# Altium PCB PCB1.PcbDoc
Units mm, origin at the board's own origin, x right, y up, seen from the top; angles counter-clockwise.
Board outline 38 x 37.5 mm, 2 copper layers (Top Layer, Bottom Layer); 4 components, 9 nets, 28 pads, 3 vias.
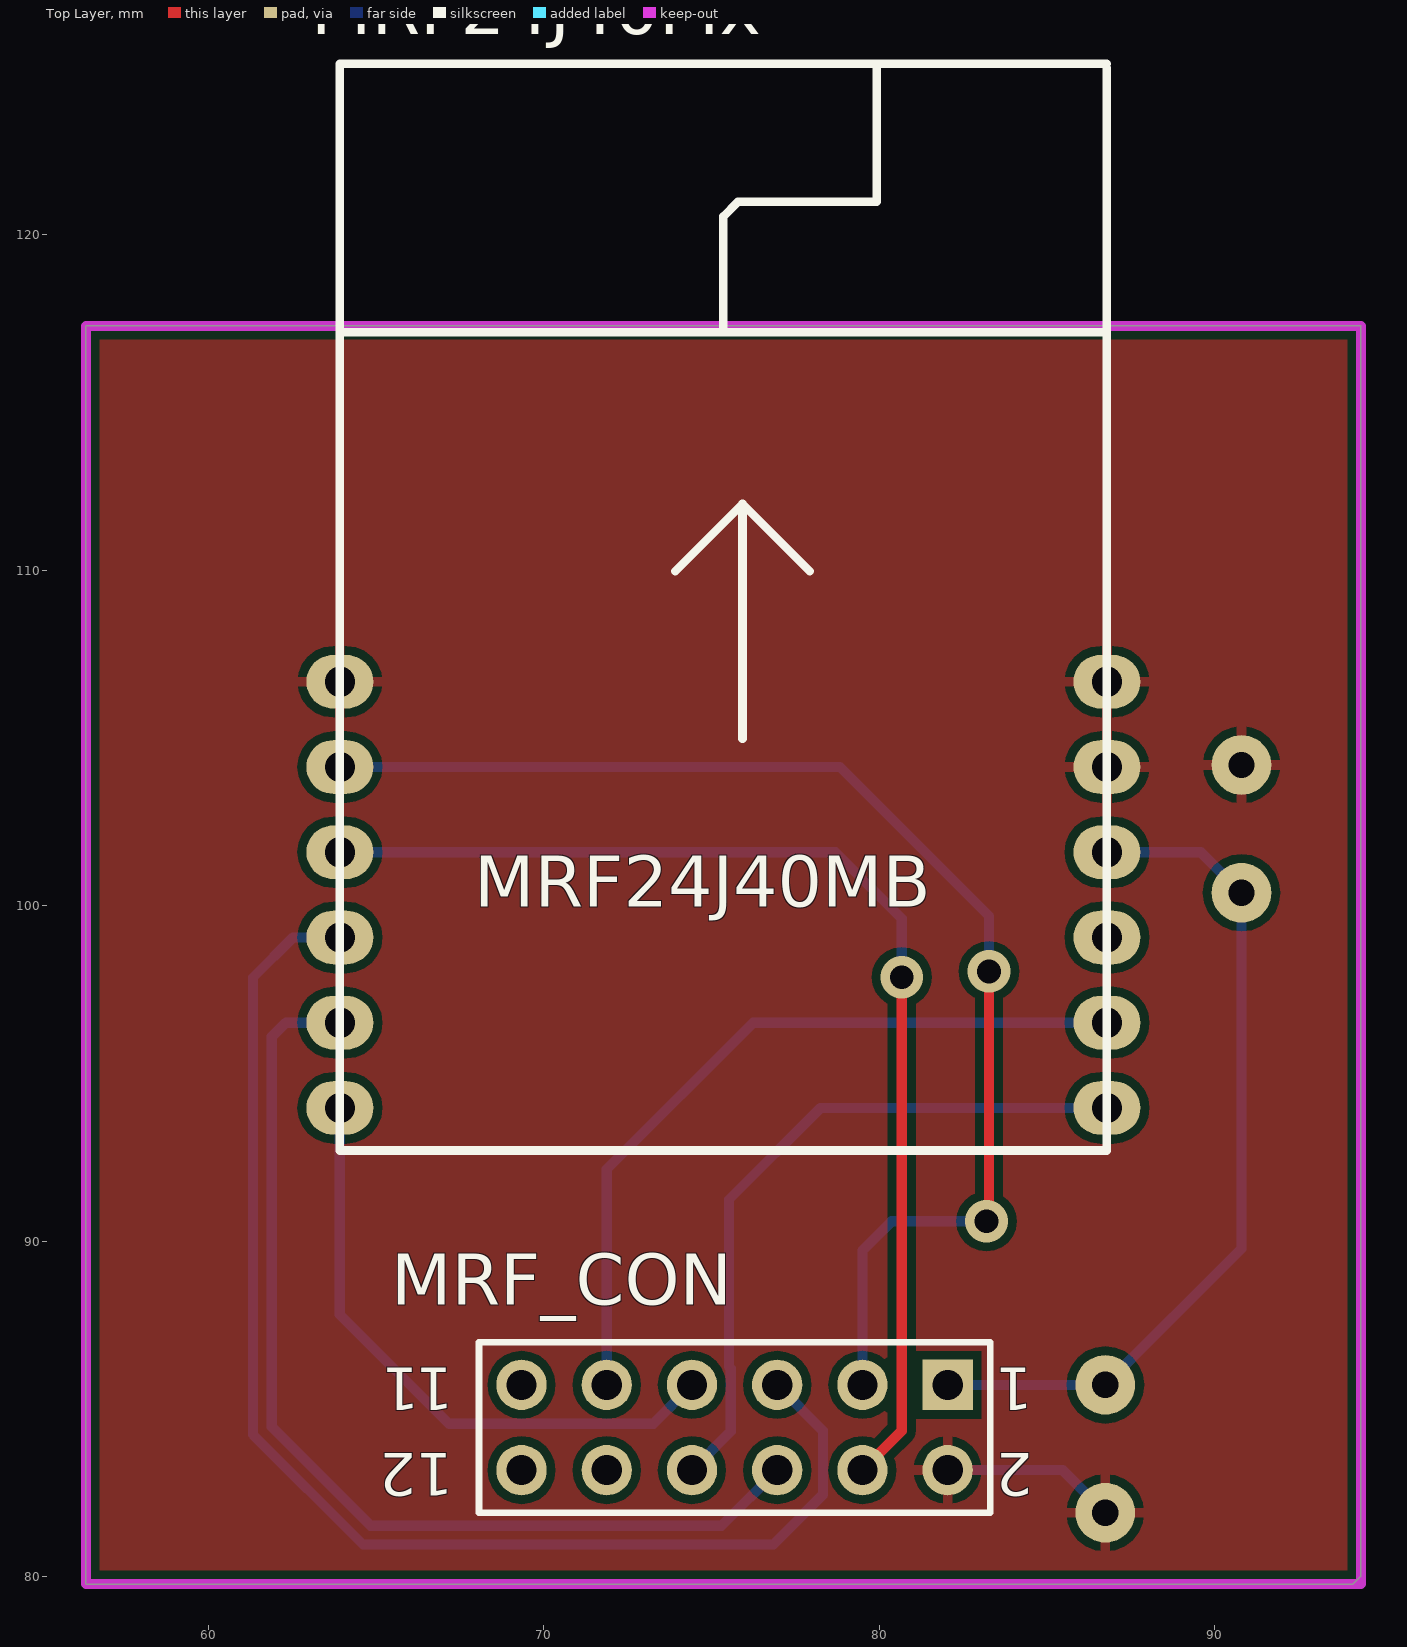
[diagram p0: Top Layer view]
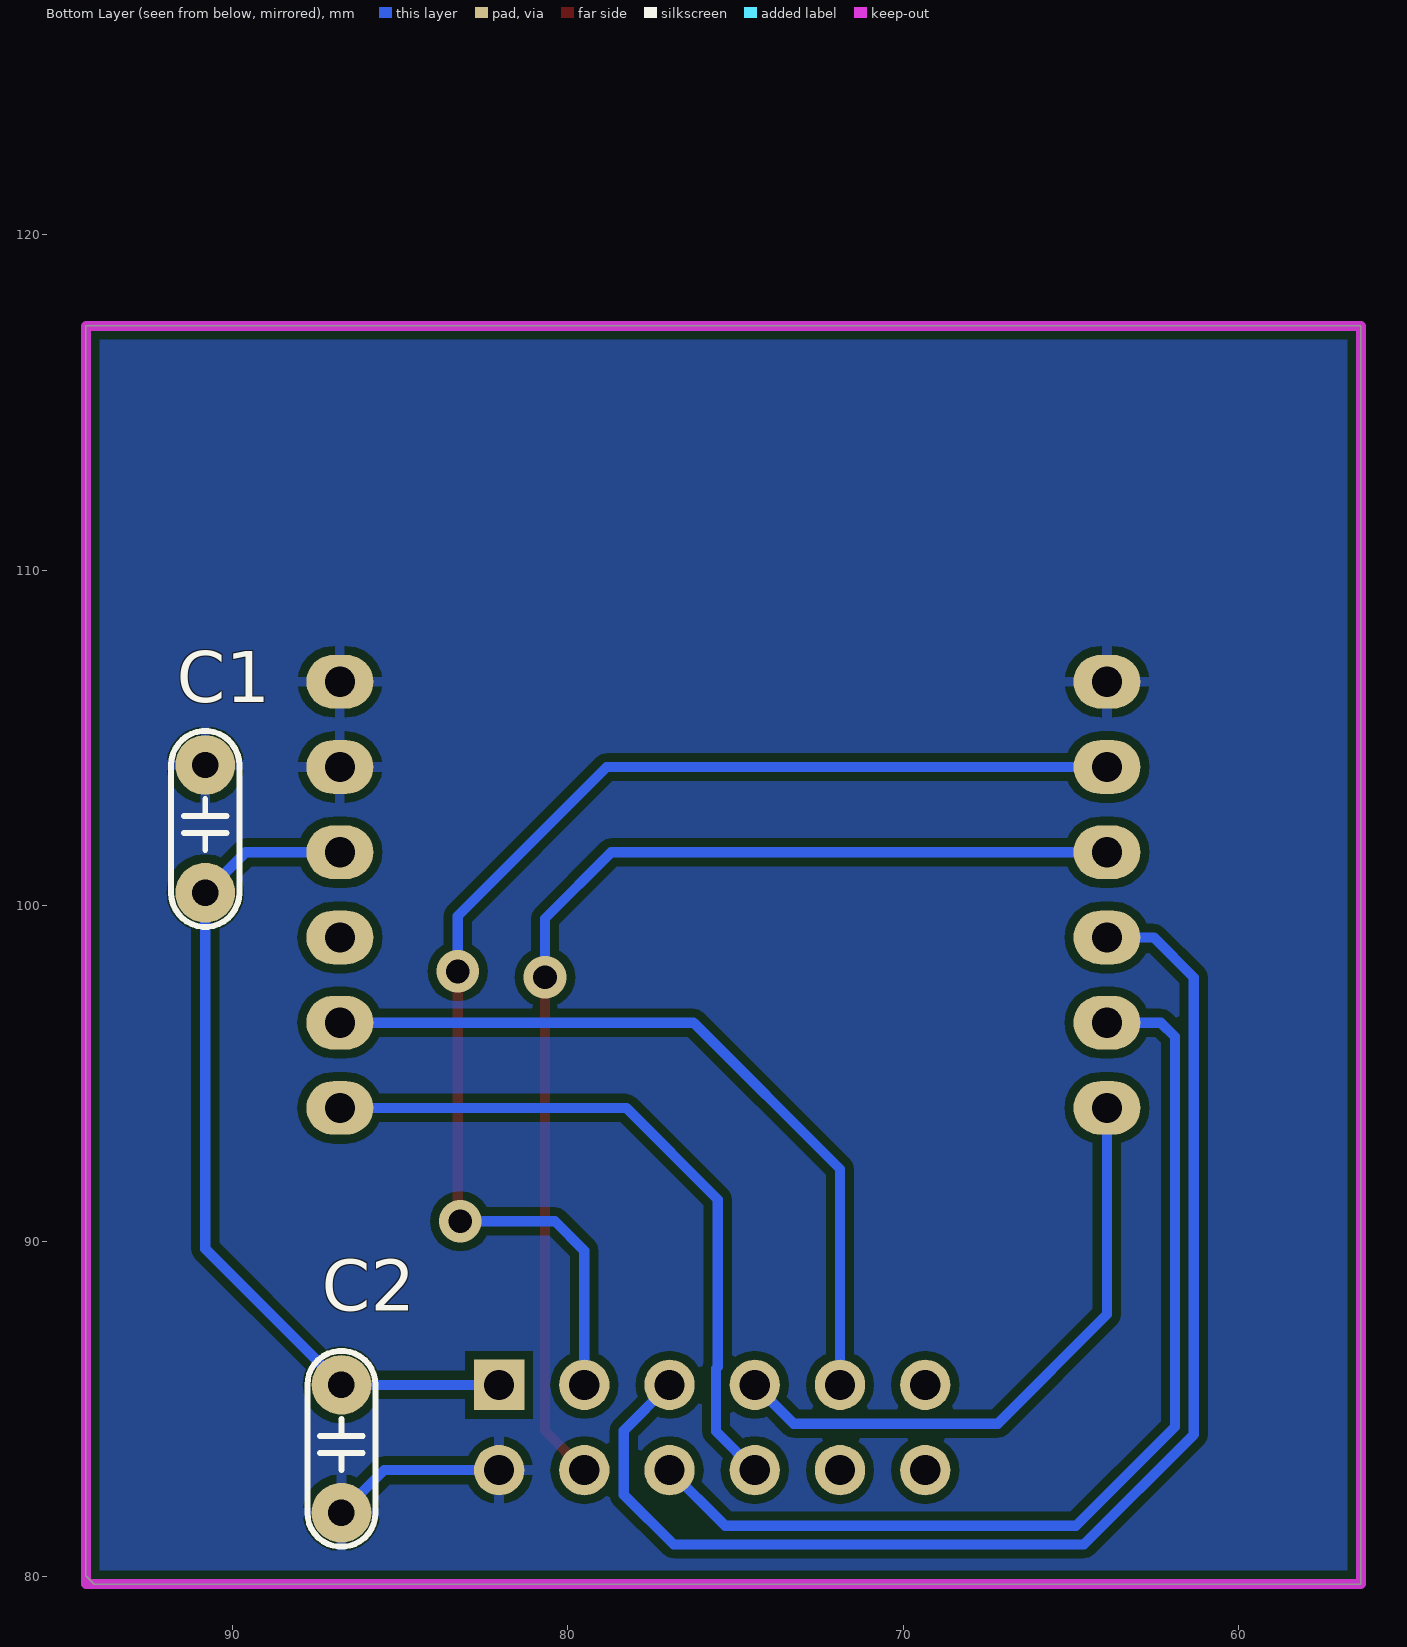
[diagram p1: Bottom Layer view, seen from below]

## Layer stack, top to bottom
Top Solder: solder mask 0.0102, Solder Resist, Dk 3.5
Top Layer: signal copper 0.0356
Dielectric1: dielectric 0.32, FR-4, Dk 4.8
Bottom Layer: signal copper 0.0356
Bottom Solder: solder mask 0.0102, Solder Resist, Dk 3.5

## Board outline
56.358,117.286 94.358,117.286 94.358,80.037 94.107,79.786 56.358,79.786

## Design rules (kind name [scope] priority, off if disabled: settings)
Clearance [All] p1: gap=0.254
PlaneConnect [All] p1: planeconnectstyle=Relief reliefexpansion=0.508 reliefentries=4 reliefconductorwidth=0.254 reliefairgap=0.305
PolygonConnect [All] p1: connectstyle=Relief reliefconductorwidth=0.305 reliefentries=4 polygonreliefangle="90 Angle" airgapwidth=0.254
RoutingVias [All] p1: holewidth=0.711 width=1.27 viastyle="Through Hole" minholewidth=0.711 minwidth=1.27 maxholewidth=0.711 maxwidth=1.27
SilkToSolderMaskClearance SilkscreenOverComponentPads [IsPad] p1: minsilkscreentomaskgap=0.254 clearancetoexposedcopper=TRUE
SolderMaskExpansion [All] p1: expansion=0.102
UnpouredPolygon [All] p1: allowunpoured=FALSE
Width [All] p1: maxlimit=0.5 minlimit=0.254 preferedwidth=0.254
27 further rules are at their usual default settings.

## Components (designator, comment, footprint, x,y, rotation, side; value= is the part's Value field where it differs from the comment)
C1 "Cap" CN1.5 90.8,104.2 r270 bottom
C2 "Cap" CN1.5 86.741,85.725 r270 bottom
MRF24J40Mx "MRF24J40MB" MRF24J40MB 63.928,93.98 r0 top
MRF_CON "Header 6X2" HDR2X6 82.042,85.725 r180 top

## Footprints (in the part's own frame and the unit in brackets; to place one, negate y for a bottom-side part, rotate by r counter-clockwise, add the part's x,y. Pads: shape width x height; smd on the part's side, far side on the other; paste and mask are expansions set on the pad)
CN1.5 [mil]
  round 70 hole 31: 1(0,0) 2(150,0)
  silkscreen extent -40,-40 190,40, body extent -40,-33 190,33, height 235
HDR2X6 [mm] "Connector; Header; 6x2 Position"
  rect 1.5x1.5 hole 0.9: 1(0,0)
  round 1.5 hole 0.9: 2(0,2.54) 3(2.54,0) 4(2.54,2.54) 5(5.08,0) 6(5.08,2.54) 7(7.62,0) 8(7.62,2.54) 10(10.16,2.54) 11(12.7,0) 12(12.7,2.54)
  round 1.5 hole 0.9 mask+0.102: 9(10.16,0)
  silkscreen extent -1.27,-1.27 13.97,3.81
MRF24J40MB [mm] "Microchip Zigbee Module"
  oval 2x1.6 hole 0.9: 1(0,12.7) 2(0,10.16) 3(0,7.62) 4(0,5.08) 5(0,2.54) 6(0,0) 7(22.86,0) 8(22.86,2.54) 9(22.86,5.08) 10(22.86,7.62) 11(22.86,10.16) 12(22.86,12.7)
  silkscreen extent 0,-1.27 22.86,31.11

## Part data
C1 C2: "Capacitor"
MRF_CON: "Header, 6-Pin, Dual row"

## Via types
v1: diameter 1.27, hole 0.711, Top Layer to Bottom Layer, 3 vias

## Nets (pads, with @x,y where several pads share a name; then routed paths per layer and width w, separated by ;. In a path a pad name is that pad's centre, name@x,y a point inside that pad or via, vN(x,y) a via of type N, cw(c..) or ccw(c..) an arc to the next point about the centre after c; other vN are vias at no path point)
3.3VDC: C1.2 C2.1 MRF24J40Mx.10 MRF_CON.1 | length 25.6
  Bottom Layer w0.305: MRF_CON.1 C2.1 90.8,89.784 C1.2 89.59,101.6 MRF24J40Mx.10
CS: MRF24J40Mx.8 MRF_CON.9 | length 23.1
  Bottom Layer w0.305: MRF_CON.9 71.882,92.157 76.245,96.52 MRF24J40Mx.8
GND: C1.1 C2.2 MRF24J40Mx.1 MRF24J40Mx.11 MRF24J40Mx.12 MRF_CON.2 | length 5.3
  Bottom Layer w0.305: MRF_CON.2 85.471,83.185 C2.2 ; C1.1@90.74,104.14 C1.1
INT: MRF24J40Mx.4 MRF_CON.5 | length 39.5
  Bottom Layer w0.305: MRF24J40Mx.4 62.535,99.06 61.341,97.866 61.341,84.243 64.618,80.966 76.841,80.966 78.325,82.45 78.325,84.362 MRF_CON.5
RESET: MRF24J40Mx.2 MRF_CON.3 | length 38.4
  Top Layer w0.305: v1(83.2,90.6) 83.275,90.675 v1(83.275,98.05)
  Bottom Layer w0.305: MRF24J40Mx.2 78.835,104.14 83.275,99.7 v1(83.275,98.05) ; MRF_CON.3 79.502,89.727 80.375,90.6 v1(83.2,90.6)
SCK: MRF24J40Mx.6 MRF_CON.7 | length 18.5
  Bottom Layer w0.305: MRF24J40Mx.6 63.928,87.822 67.182,84.568 73.265,84.568 MRF_CON.7
SDI: MRF24J40Mx.5 MRF_CON.6 | length 30.8
  Bottom Layer w0.305: MRF24J40Mx.5 62.32,96.52 61.9,96.1 61.9,84.475 64.85,81.525 75.302,81.525 MRF_CON.6
SDO: MRF24J40Mx.7 MRF_CON.8 | length 21
  Bottom Layer w0.305: MRF_CON.8 75.579,84.342 75.579,86.204 75.525,86.258 75.525,91.25 78.255,93.98 MRF24J40Mx.7
WAKE: MRF24J40Mx.3 MRF_CON.4 | length 34.5
  Top Layer w0.305: MRF_CON.4 80.675,84.358 v1(80.675,97.875)
  Bottom Layer w0.305: MRF24J40Mx.3 78.7,101.6 80.675,99.625 v1(80.675,97.875)
pads on no net: MRF24J40Mx.9 MRF_CON.10 MRF_CON.11 MRF_CON.12

## Polygon pours and split planes (outlines as drawn)
GND on Bottom Layer "Top Layer-No Net 1" (solid, pour order 4): 56.575,117.286 94.358,117.286 94.358,79.786 94.269,79.875 56.358,79.875
GND on Top Layer "Top Layer-No Net 1" (solid, pour order 6): 56.358,117.286 94.325,117.286 94.358,117.253 94.358,79.786 56.522,79.786 56.358,79.95

## Keep-outs
Keep-Out Layer:
  lines w0.3: 56.358,79.786 94.358,79.786 94.358,117.286 56.358,117.286 56.358,79.786

## Silkscreen, mask and mechanical layers (free items; w line width, h text height)
Mechanical 4:
  lines w0.254: 56.358,79.786 94.11,79.786 94.234,79.91 94.234,116.905 93.853,117.286 ; 56.358,117.286 94.358,117.286
Drill Drawing:
  text ".LEGEND" at 100.738,83.566 h1.52
  text "Drill Drawing." at 100.738,81.026 h1.52

## Dimensions
56.358,79.786 to 94.358,79.786 on Mechanical 1
56.358,79.786 to 56.358,117.286 on Mechanical 1

## Text inside footprints (layer, text, board x,y; h text height)
MRF_CON: Top Overlay "12" at 67.31,83.693 h1.27 r180; Top Overlay "1" at 66.294,86.233 h1.27 r180; Top Overlay "1" at 67.31,86.233 h1.27 r180; Top Overlay "1" at 84.582,86.233 h1.27 r180; Top Overlay "2" at 84.582,83.693 h1.27 r180